# EAGLE board MOSFET_driver Panel v10 (EAGLE 6.3)
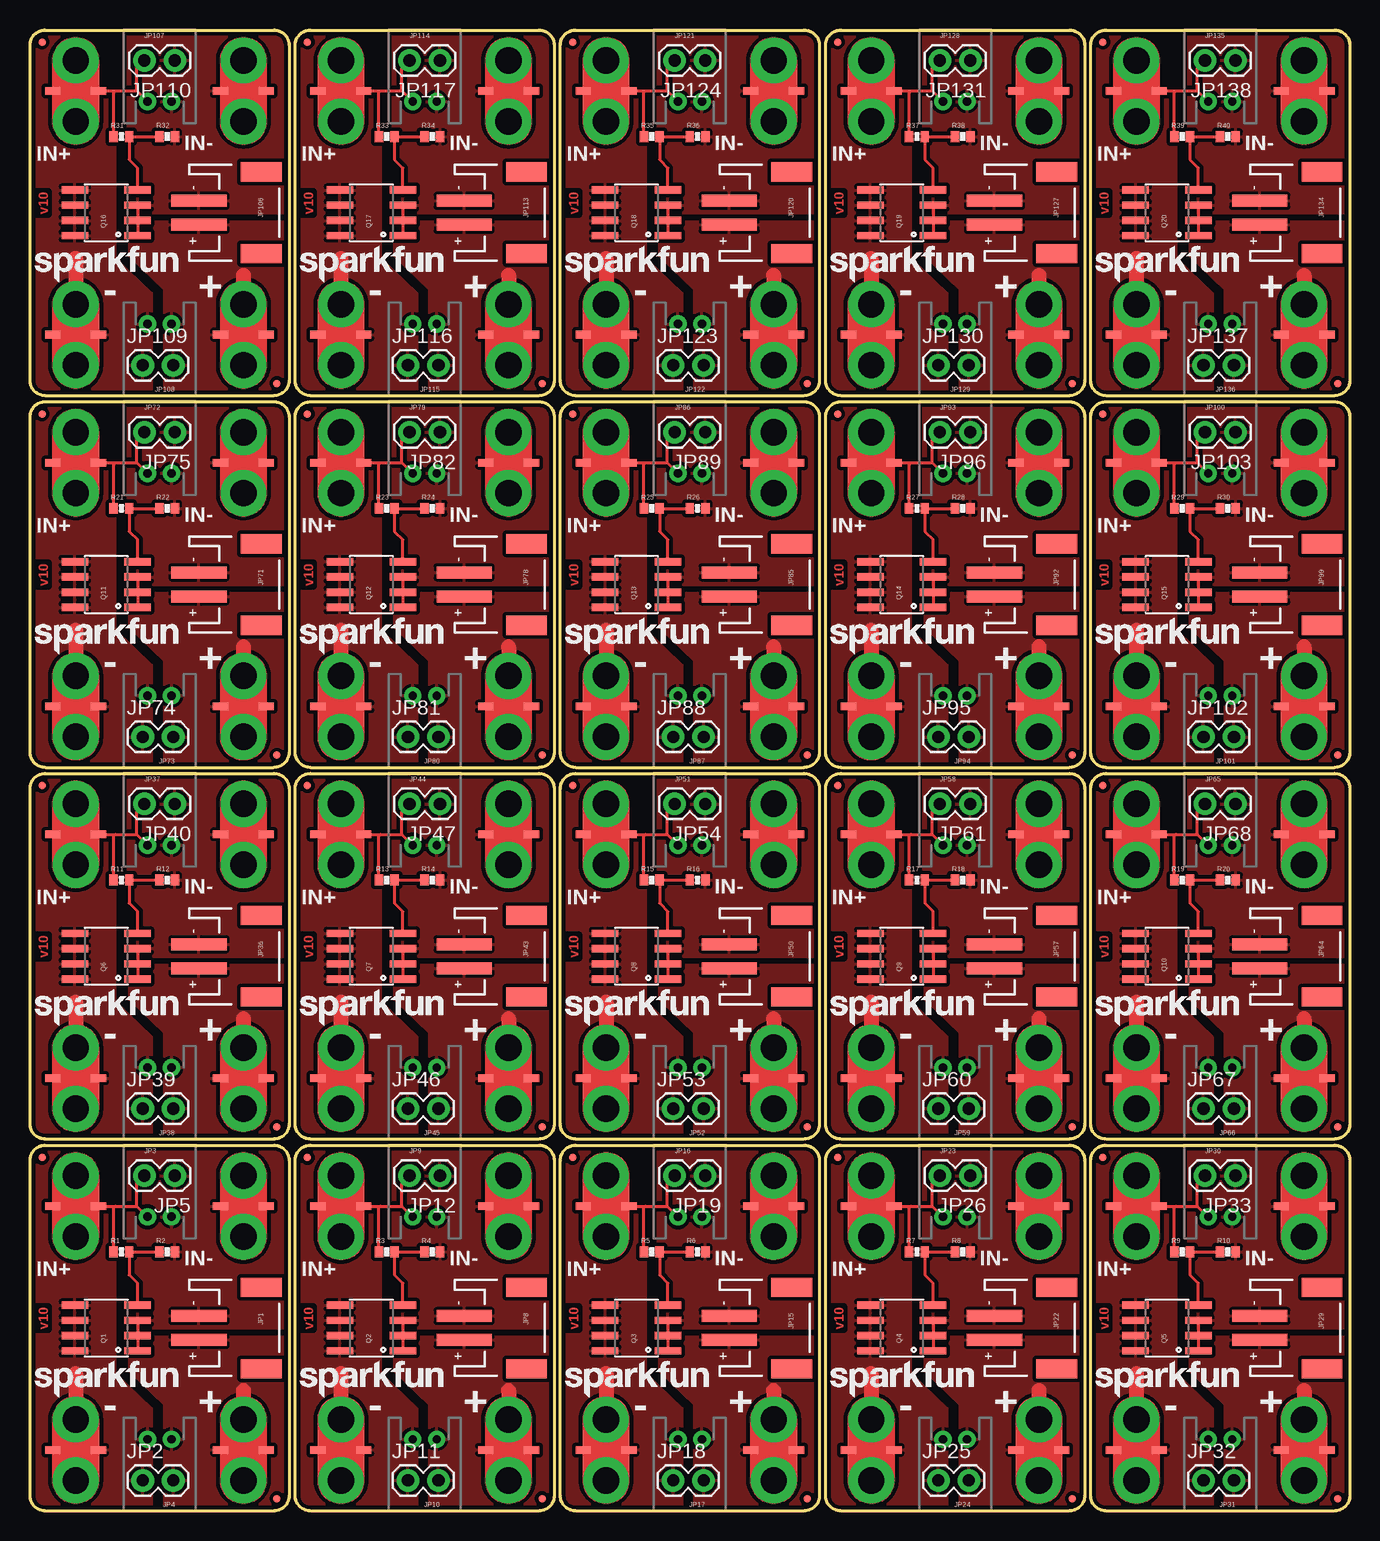
[diagram p0: board, top side]
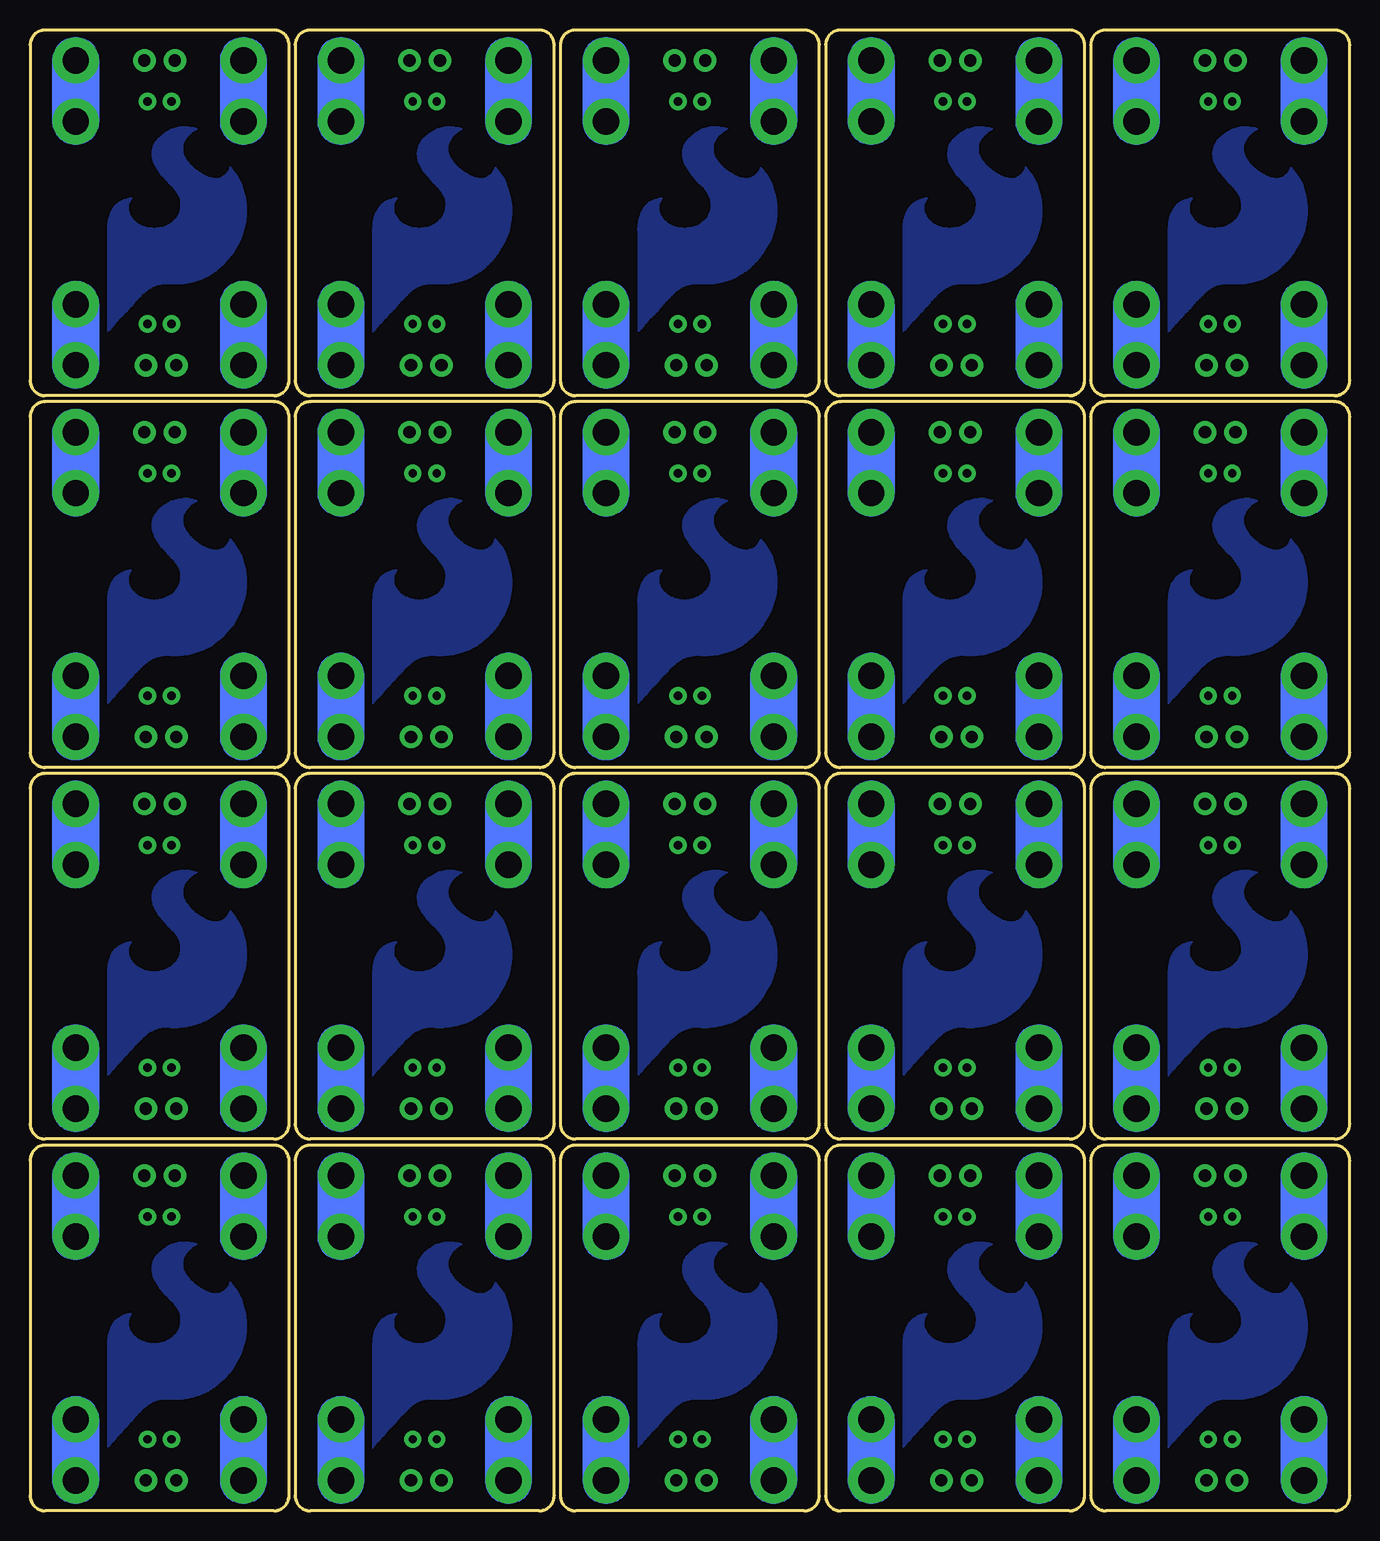
[diagram p1: board, bottom side, seen from below]

Size 109.98 x 123.44 mm. Coordinates in mm from the lower left corner, seen from the top.
Outline: 1.27,0 20.32,0 arc90 21.59,1.27 21.59,29.21 arc90 20.32,30.48 1.27,30.48 arc90 0,29.21 0,1.27 arc90 1.27,0
Outline: 23.37,0 42.42,0 arc90 43.69,1.27 43.69,29.21 arc90 42.42,30.48 23.37,30.48 arc90 22.1,29.21 22.1,1.27 arc90 23.37,0
Outline: 45.47,0 64.52,0 arc90 65.79,1.27 65.79,29.21 arc90 64.52,30.48 45.47,30.48 arc90 44.2,29.21 44.2,1.27 arc90 45.47,0
Outline: 67.56,0 86.61,0 arc90 87.88,1.27 87.88,29.21 arc90 86.61,30.48 67.56,30.48 arc90 66.29,29.21 66.29,1.27 arc90 67.56,0
Outline: 89.66,0 108.71,0 arc90 109.98,1.27 109.98,29.21 arc90 108.71,30.48 89.66,30.48 arc90 88.39,29.21 88.39,1.27 arc90 89.66,0
Outline: 1.27,30.99 20.32,30.99 arc90 21.59,32.26 21.59,60.2 arc90 20.32,61.47 1.27,61.47 arc90 0,60.2 0,32.26 arc90 1.27,30.99
Outline: 23.37,30.99 42.42,30.99 arc90 43.69,32.26 43.69,60.2 arc90 42.42,61.47 23.37,61.47 arc90 22.1,60.2 22.1,32.26 arc90 23.37,30.99
Outline: 45.47,30.99 64.52,30.99 arc90 65.79,32.26 65.79,60.2 arc90 64.52,61.47 45.47,61.47 arc90 44.2,60.2 44.2,32.26 arc90 45.47,30.99
Outline: 67.56,30.99 86.61,30.99 arc90 87.88,32.26 87.88,60.2 arc90 86.61,61.47 67.56,61.47 arc90 66.29,60.2 66.29,32.26 arc90 67.56,30.99
Outline: 89.66,30.99 108.71,30.99 arc90 109.98,32.26 109.98,60.2 arc90 108.71,61.47 89.66,61.47 arc90 88.39,60.2 88.39,32.26 arc90 89.66,30.99
Outline: 1.27,61.98 20.32,61.98 arc90 21.59,63.25 21.59,91.19 arc90 20.32,92.46 1.27,92.46 arc90 0,91.19 0,63.25 arc90 1.27,61.98
Outline: 23.37,61.98 42.42,61.98 arc90 43.69,63.25 43.69,91.19 arc90 42.42,92.46 23.37,92.46 arc90 22.1,91.19 22.1,63.25 arc90 23.37,61.98
Outline: 45.47,61.98 64.52,61.98 arc90 65.79,63.25 65.79,91.19 arc90 64.52,92.46 45.47,92.46 arc90 44.2,91.19 44.2,63.25 arc90 45.47,61.98
Outline: 67.56,61.98 86.61,61.98 arc90 87.88,63.25 87.88,91.19 arc90 86.61,92.46 67.56,92.46 arc90 66.29,91.19 66.29,63.25 arc90 67.56,61.98
Outline: 89.66,61.98 108.71,61.98 arc90 109.98,63.25 109.98,91.19 arc90 108.71,92.46 89.66,92.46 arc90 88.39,91.19 88.39,63.25 arc90 89.66,61.98
Outline: 1.27,92.96 20.32,92.96 arc90 21.59,94.23 21.59,122.17 arc90 20.32,123.44 1.27,123.44 arc90 0,122.17 0,94.23 arc90 1.27,92.96
Outline: 23.37,92.96 42.42,92.96 arc90 43.69,94.23 43.69,122.17 arc90 42.42,123.44 23.37,123.44 arc90 22.1,122.17 22.1,94.23 arc90 23.37,92.96
Outline: 45.47,92.96 64.52,92.96 arc90 65.79,94.23 65.79,122.17 arc90 64.52,123.44 45.47,123.44 arc90 44.2,122.17 44.2,94.23 arc90 45.47,92.96
Outline: 67.56,92.96 86.61,92.96 arc90 87.88,94.23 87.88,122.17 arc90 86.61,123.44 67.56,123.44 arc90 66.29,122.17 66.29,94.23 arc90 67.56,92.96
Outline: 89.66,92.96 108.71,92.96 arc90 109.98,94.23 109.98,122.17 arc90 108.71,123.44 89.66,123.44 arc90 88.39,122.17 88.39,94.23 arc90 89.66,92.96
Copper layers (1*16): Top 0.035mm / dielectric 1.5mm / Bottom 0.035mm
Design rules "default": minimum track width 8mil, minimum drill 20mil, track to track 8mil, track to pad 8mil, pad to pad 8mil, via to via 8mil, smd to smd 8mil, copper to edge 8mil, drill to drill 8mil, minimum pad ring 12mil, minimum via ring 10mil, stop-mask expansion 4mil, vias tented up to drill 20mil, thermal gap 10mil
bRestrict: area 0,-0.1 to 16.5,30.4; area 5.1,-0.1 to 21.6,30.4; area 22.1,-0.1 to 38.6,30.4; area 27.2,-0.1 to 43.7,30.4; area 44.2,-0.1 to 60.7,30.4; area 49.3,-0.1 to 65.8,30.4; area 66.3,-0.1 to 82.8,30.4; area 71.4,-0.1 to 87.9,30.4; area 88.4,-0.1 to 104.9,30.4; area 93.5,-0.1 to 110,30.4; area 0,30.9 to 16.5,61.3; area 5.1,30.9 to 21.6,61.3; area 22.1,30.9 to 38.6,61.3; area 27.2,30.9 to 43.7,61.3; area 44.2,30.9 to 60.7,61.3; area 49.3,30.9 to 65.8,61.3; area 66.3,30.9 to 82.8,61.3; area 71.4,30.9 to 87.9,61.3; area 88.4,30.9 to 104.9,61.3; area 93.5,30.9 to 110,61.3; area 0,61.8 to 16.5,92.3; area 5.1,61.8 to 21.6,92.3; area 22.1,61.8 to 38.6,92.3; area 27.2,61.8 to 43.7,92.3; area 44.2,61.8 to 60.7,92.3; area 49.3,61.8 to 65.8,92.3; area 66.3,61.8 to 82.8,92.3; area 71.4,61.8 to 87.9,92.3; area 88.4,61.8 to 104.9,92.3; area 93.5,61.8 to 110,92.3; area 0,92.8 to 16.5,123.3; area 5.1,92.8 to 21.6,123.3; area 22.1,92.8 to 38.6,123.3; area 27.2,92.8 to 43.7,123.3; area 44.2,92.8 to 60.7,123.3; area 49.3,92.8 to 65.8,123.3; area 66.3,92.8 to 82.8,123.3; area 71.4,92.8 to 87.9,123.3; area 88.4,92.8 to 104.9,123.3; area 93.5,92.8 to 110,123.3

## Footprints (pad centres in the part's own frame; a part is rotated, then mirrored left to right if it is on the bottom)
BUTTONHOLE = drill 2.2 pad 3.81: 1 0,0; P$2 5.08,0 | smd 0.635 x 1.27: P$1 2.54,1.905; P$3 2.54,-1.905
JST-2-SMD = smd 1 x 4.6: 1 -1,-3.7; 2 1,-3.7 | smd 1.6 x 3.4: NC1 -3.4,1.5; NC2 3.4,1.5
1X02 = drill 1.016 pad 1.88: 1 0,0; 2 2.54,0
JST-2-PTH-NS = drill 0.7 pad 1.448: 1 -1,0; 2 1,0
MICRO-FIDUCIAL = smd 0.635 x 0.635: 1 0,0
SO08 = smd 0.61 x 2.21: 1 -1.905,-2.616; 2 -0.635,-2.616; 3 0.635,-2.616; 4 1.905,-2.616; 5 1.905,2.616; 6 0.635,2.616; 7 -0.635,2.616; 8 -1.905,2.616
0402-RES = smd 0.7 x 0.9: 1 -0.65,0; 2 0.65,0

## Placement (x,y rotation side)
BH1  TRIG+  [BUTTONHOLE]  3.81,27.94 270 top
BH2  TRIG-  [BUTTONHOLE]  17.78,22.86 90 top
BH3  OUT+  [BUTTONHOLE]  17.78,2.54 90 top
BH4  OUT-  [BUTTONHOLE]  3.81,7.62 270 top
BH5  TRIG+  [BUTTONHOLE]  25.91,27.94 270 top
BH6  TRIG-  [BUTTONHOLE]  39.88,22.86 90 top
BH7  OUT+  [BUTTONHOLE]  39.88,2.54 90 top
BH8  OUT-  [BUTTONHOLE]  25.91,7.62 270 top
BH9  TRIG+  [BUTTONHOLE]  48.01,27.94 270 top
BH10  TRIG-  [BUTTONHOLE]  61.98,22.86 90 top
BH11  OUT+  [BUTTONHOLE]  61.98,2.54 90 top
BH12  OUT-  [BUTTONHOLE]  48.01,7.62 270 top
BH13  TRIG+  [BUTTONHOLE]  70.1,27.94 270 top
BH14  TRIG-  [BUTTONHOLE]  84.07,22.86 90 top
BH15  OUT+  [BUTTONHOLE]  84.07,2.54 90 top
BH16  OUT-  [BUTTONHOLE]  70.1,7.62 270 top
BH17  TRIG+  [BUTTONHOLE]  92.2,27.94 270 top
BH18  TRIG-  [BUTTONHOLE]  106.17,22.86 90 top
BH19  OUT+  [BUTTONHOLE]  106.17,2.54 90 top
BH20  OUT-  [BUTTONHOLE]  92.2,7.62 270 top
BH21  TRIG+  [BUTTONHOLE]  3.81,58.93 270 top
BH22  TRIG-  [BUTTONHOLE]  17.78,53.85 90 top
BH23  OUT+  [BUTTONHOLE]  17.78,33.53 90 top
BH24  OUT-  [BUTTONHOLE]  3.81,38.61 270 top
BH25  TRIG+  [BUTTONHOLE]  25.91,58.93 270 top
BH26  TRIG-  [BUTTONHOLE]  39.88,53.85 90 top
BH27  OUT+  [BUTTONHOLE]  39.88,33.53 90 top
BH28  OUT-  [BUTTONHOLE]  25.91,38.61 270 top
BH29  TRIG+  [BUTTONHOLE]  48.01,58.93 270 top
BH30  TRIG-  [BUTTONHOLE]  61.98,53.85 90 top
BH31  OUT+  [BUTTONHOLE]  61.98,33.53 90 top
BH32  OUT-  [BUTTONHOLE]  48.01,38.61 270 top
BH33  TRIG+  [BUTTONHOLE]  70.1,58.93 270 top
BH34  TRIG-  [BUTTONHOLE]  84.07,53.85 90 top
BH35  OUT+  [BUTTONHOLE]  84.07,33.53 90 top
BH36  OUT-  [BUTTONHOLE]  70.1,38.61 270 top
BH37  TRIG+  [BUTTONHOLE]  92.2,58.93 270 top
BH38  TRIG-  [BUTTONHOLE]  106.17,53.85 90 top
BH39  OUT+  [BUTTONHOLE]  106.17,33.53 90 top
BH40  OUT-  [BUTTONHOLE]  92.2,38.61 270 top
BH41  TRIG+  [BUTTONHOLE]  3.81,89.92 270 top
BH42  TRIG-  [BUTTONHOLE]  17.78,84.84 90 top
BH43  OUT+  [BUTTONHOLE]  17.78,64.52 90 top
BH44  OUT-  [BUTTONHOLE]  3.81,69.6 270 top
BH45  TRIG+  [BUTTONHOLE]  25.91,89.92 270 top
BH46  TRIG-  [BUTTONHOLE]  39.88,84.84 90 top
BH47  OUT+  [BUTTONHOLE]  39.88,64.52 90 top
BH48  OUT-  [BUTTONHOLE]  25.91,69.6 270 top
BH49  TRIG+  [BUTTONHOLE]  48.01,89.92 270 top
BH50  TRIG-  [BUTTONHOLE]  61.98,84.84 90 top
BH51  OUT+  [BUTTONHOLE]  61.98,64.52 90 top
BH52  OUT-  [BUTTONHOLE]  48.01,69.6 270 top
BH53  TRIG+  [BUTTONHOLE]  70.1,89.92 270 top
BH54  TRIG-  [BUTTONHOLE]  84.07,84.84 90 top
BH55  OUT+  [BUTTONHOLE]  84.07,64.52 90 top
BH56  OUT-  [BUTTONHOLE]  70.1,69.6 270 top
BH57  TRIG+  [BUTTONHOLE]  92.2,89.92 270 top
BH58  TRIG-  [BUTTONHOLE]  106.17,84.84 90 top
BH59  OUT+  [BUTTONHOLE]  106.17,64.52 90 top
BH60  OUT-  [BUTTONHOLE]  92.2,69.6 270 top
BH61  TRIG+  [BUTTONHOLE]  3.81,120.9 270 top
BH62  TRIG-  [BUTTONHOLE]  17.78,115.82 90 top
BH63  OUT+  [BUTTONHOLE]  17.78,95.5 90 top
BH64  OUT-  [BUTTONHOLE]  3.81,100.58 270 top
BH65  TRIG+  [BUTTONHOLE]  25.91,120.9 270 top
BH66  TRIG-  [BUTTONHOLE]  39.88,115.82 90 top
BH67  OUT+  [BUTTONHOLE]  39.88,95.5 90 top
BH68  OUT-  [BUTTONHOLE]  25.91,100.58 270 top
BH69  TRIG+  [BUTTONHOLE]  48.01,120.9 270 top
BH70  TRIG-  [BUTTONHOLE]  61.98,115.82 90 top
BH71  OUT+  [BUTTONHOLE]  61.98,95.5 90 top
BH72  OUT-  [BUTTONHOLE]  48.01,100.58 270 top
BH73  TRIG+  [BUTTONHOLE]  70.1,120.9 270 top
BH74  TRIG-  [BUTTONHOLE]  84.07,115.82 90 top
BH75  OUT+  [BUTTONHOLE]  84.07,95.5 90 top
BH76  OUT-  [BUTTONHOLE]  70.1,100.58 270 top
BH77  TRIG+  [BUTTONHOLE]  92.2,120.9 270 top
BH78  TRIG-  [BUTTONHOLE]  106.17,115.82 90 top
BH79  OUT+  [BUTTONHOLE]  106.17,95.5 90 top
BH80  OUT-  [BUTTONHOLE]  92.2,100.58 270 top
JP1  JST-SMT  [JST-2-SMD]  17.78,15.24 270 top
JP2  [1X02]  9.4,2.54 0 top
JP3  JST-PTH  [JST-2-PTH-NS]  10.79,24.51 0 top
JP4  JST-PTH  [JST-2-PTH-NS]  10.79,5.97 180 top
JP5  [1X02]  12.06,27.94 180 top
JP6  FIDUCIALUFIDUCIAL  [MICRO-FIDUCIAL]  20.57,1.02 0 top
JP7  FIDUCIALUFIDUCIAL  [MICRO-FIDUCIAL]  1.02,29.46 0 top
JP8  JST-SMT  [JST-2-SMD]  39.88,15.24 270 top
JP9  JST-PTH  [JST-2-PTH-NS]  32.89,24.51 0 top
JP10  JST-PTH  [JST-2-PTH-NS]  32.89,5.97 180 top
JP11  [1X02]  31.5,2.54 0 top
JP12  [1X02]  34.16,27.94 180 top
JP13  FIDUCIALUFIDUCIAL  [MICRO-FIDUCIAL]  42.67,1.02 0 top
JP14  FIDUCIALUFIDUCIAL  [MICRO-FIDUCIAL]  23.11,29.46 0 top
JP15  JST-SMT  [JST-2-SMD]  61.98,15.24 270 top
JP16  JST-PTH  [JST-2-PTH-NS]  54.99,24.51 0 top
JP17  JST-PTH  [JST-2-PTH-NS]  54.99,5.97 180 top
JP18  [1X02]  53.59,2.54 0 top
JP19  [1X02]  56.26,27.94 180 top
JP20  FIDUCIALUFIDUCIAL  [MICRO-FIDUCIAL]  64.77,1.02 0 top
JP21  FIDUCIALUFIDUCIAL  [MICRO-FIDUCIAL]  45.21,29.46 0 top
JP22  JST-SMT  [JST-2-SMD]  84.07,15.24 270 top
JP23  JST-PTH  [JST-2-PTH-NS]  77.09,24.51 0 top
JP24  JST-PTH  [JST-2-PTH-NS]  77.09,5.97 180 top
JP25  [1X02]  75.69,2.54 0 top
JP26  [1X02]  78.36,27.94 180 top
JP27  FIDUCIALUFIDUCIAL  [MICRO-FIDUCIAL]  86.87,1.02 0 top
JP28  FIDUCIALUFIDUCIAL  [MICRO-FIDUCIAL]  67.31,29.46 0 top
JP29  JST-SMT  [JST-2-SMD]  106.17,15.24 270 top
JP30  JST-PTH  [JST-2-PTH-NS]  99.19,24.51 0 top
JP31  JST-PTH  [JST-2-PTH-NS]  99.19,5.97 180 top
JP32  [1X02]  97.79,2.54 0 top
JP33  [1X02]  100.46,27.94 180 top
JP34  FIDUCIALUFIDUCIAL  [MICRO-FIDUCIAL]  108.97,1.02 0 top
JP35  FIDUCIALUFIDUCIAL  [MICRO-FIDUCIAL]  89.41,29.46 0 top
JP36  JST-SMT  [JST-2-SMD]  17.78,46.23 270 top
JP37  JST-PTH  [JST-2-PTH-NS]  10.79,55.5 0 top
JP38  JST-PTH  [JST-2-PTH-NS]  10.79,36.96 180 top
JP39  [1X02]  9.4,33.53 0 top
JP40  [1X02]  12.06,58.93 180 top
JP41  FIDUCIALUFIDUCIAL  [MICRO-FIDUCIAL]  20.57,32 0 top
JP42  FIDUCIALUFIDUCIAL  [MICRO-FIDUCIAL]  1.02,60.45 0 top
JP43  JST-SMT  [JST-2-SMD]  39.88,46.23 270 top
JP44  JST-PTH  [JST-2-PTH-NS]  32.89,55.5 0 top
JP45  JST-PTH  [JST-2-PTH-NS]  32.89,36.96 180 top
JP46  [1X02]  31.5,33.53 0 top
JP47  [1X02]  34.16,58.93 180 top
JP48  FIDUCIALUFIDUCIAL  [MICRO-FIDUCIAL]  42.67,32 0 top
JP49  FIDUCIALUFIDUCIAL  [MICRO-FIDUCIAL]  23.11,60.45 0 top
JP50  JST-SMT  [JST-2-SMD]  61.98,46.23 270 top
JP51  JST-PTH  [JST-2-PTH-NS]  54.99,55.5 0 top
JP52  JST-PTH  [JST-2-PTH-NS]  54.99,36.96 180 top
JP53  [1X02]  53.59,33.53 0 top
JP54  [1X02]  56.26,58.93 180 top
JP55  FIDUCIALUFIDUCIAL  [MICRO-FIDUCIAL]  64.77,32 0 top
JP56  FIDUCIALUFIDUCIAL  [MICRO-FIDUCIAL]  45.21,60.45 0 top
JP57  JST-SMT  [JST-2-SMD]  84.07,46.23 270 top
JP58  JST-PTH  [JST-2-PTH-NS]  77.09,55.5 0 top
JP59  JST-PTH  [JST-2-PTH-NS]  77.09,36.96 180 top
JP60  [1X02]  75.69,33.53 0 top
JP61  [1X02]  78.36,58.93 180 top
JP62  FIDUCIALUFIDUCIAL  [MICRO-FIDUCIAL]  86.87,32 0 top
JP63  FIDUCIALUFIDUCIAL  [MICRO-FIDUCIAL]  67.31,60.45 0 top
JP64  JST-SMT  [JST-2-SMD]  106.17,46.23 270 top
JP65  JST-PTH  [JST-2-PTH-NS]  99.19,55.5 0 top
JP66  JST-PTH  [JST-2-PTH-NS]  99.19,36.96 180 top
JP67  [1X02]  97.79,33.53 0 top
JP68  [1X02]  100.46,58.93 180 top
JP69  FIDUCIALUFIDUCIAL  [MICRO-FIDUCIAL]  108.97,32 0 top
JP70  FIDUCIALUFIDUCIAL  [MICRO-FIDUCIAL]  89.41,60.45 0 top
JP71  JST-SMT  [JST-2-SMD]  17.78,77.22 270 top
JP72  JST-PTH  [JST-2-PTH-NS]  10.79,86.49 0 top
JP73  JST-PTH  [JST-2-PTH-NS]  10.79,67.94 180 top
JP74  [1X02]  9.4,64.52 0 top
JP75  [1X02]  12.06,89.92 180 top
JP76  FIDUCIALUFIDUCIAL  [MICRO-FIDUCIAL]  20.57,62.99 0 top
JP77  FIDUCIALUFIDUCIAL  [MICRO-FIDUCIAL]  1.02,91.44 0 top
JP78  JST-SMT  [JST-2-SMD]  39.88,77.22 270 top
JP79  JST-PTH  [JST-2-PTH-NS]  32.89,86.49 0 top
JP80  JST-PTH  [JST-2-PTH-NS]  32.89,67.94 180 top
JP81  [1X02]  31.5,64.52 0 top
JP82  [1X02]  34.16,89.92 180 top
JP83  FIDUCIALUFIDUCIAL  [MICRO-FIDUCIAL]  42.67,62.99 0 top
JP84  FIDUCIALUFIDUCIAL  [MICRO-FIDUCIAL]  23.11,91.44 0 top
JP85  JST-SMT  [JST-2-SMD]  61.98,77.22 270 top
JP86  JST-PTH  [JST-2-PTH-NS]  54.99,86.49 0 top
JP87  JST-PTH  [JST-2-PTH-NS]  54.99,67.94 180 top
JP88  [1X02]  53.59,64.52 0 top
JP89  [1X02]  56.26,89.92 180 top
JP90  FIDUCIALUFIDUCIAL  [MICRO-FIDUCIAL]  64.77,62.99 0 top
JP91  FIDUCIALUFIDUCIAL  [MICRO-FIDUCIAL]  45.21,91.44 0 top
JP92  JST-SMT  [JST-2-SMD]  84.07,77.22 270 top
JP93  JST-PTH  [JST-2-PTH-NS]  77.09,86.49 0 top
JP94  JST-PTH  [JST-2-PTH-NS]  77.09,67.94 180 top
JP95  [1X02]  75.69,64.52 0 top
JP96  [1X02]  78.36,89.92 180 top
JP97  FIDUCIALUFIDUCIAL  [MICRO-FIDUCIAL]  86.87,62.99 0 top
JP98  FIDUCIALUFIDUCIAL  [MICRO-FIDUCIAL]  67.31,91.44 0 top
JP99  JST-SMT  [JST-2-SMD]  106.17,77.22 270 top
JP100  JST-PTH  [JST-2-PTH-NS]  99.19,86.49 0 top
JP101  JST-PTH  [JST-2-PTH-NS]  99.19,67.94 180 top
JP102  [1X02]  97.79,64.52 0 top
JP103  [1X02]  100.46,89.92 180 top
JP104  FIDUCIALUFIDUCIAL  [MICRO-FIDUCIAL]  108.97,62.99 0 top
JP105  FIDUCIALUFIDUCIAL  [MICRO-FIDUCIAL]  89.41,91.44 0 top
JP106  JST-SMT  [JST-2-SMD]  17.78,108.2 270 top
JP107  JST-PTH  [JST-2-PTH-NS]  10.79,117.47 0 top
JP108  JST-PTH  [JST-2-PTH-NS]  10.79,98.93 180 top
JP109  [1X02]  9.4,95.5 0 top
JP110  [1X02]  12.06,120.9 180 top
JP111  FIDUCIALUFIDUCIAL  [MICRO-FIDUCIAL]  20.57,93.98 0 top
JP112  FIDUCIALUFIDUCIAL  [MICRO-FIDUCIAL]  1.02,122.43 0 top
JP113  JST-SMT  [JST-2-SMD]  39.88,108.2 270 top
JP114  JST-PTH  [JST-2-PTH-NS]  32.89,117.47 0 top
JP115  JST-PTH  [JST-2-PTH-NS]  32.89,98.93 180 top
JP116  [1X02]  31.5,95.5 0 top
JP117  [1X02]  34.16,120.9 180 top
JP118  FIDUCIALUFIDUCIAL  [MICRO-FIDUCIAL]  42.67,93.98 0 top
JP119  FIDUCIALUFIDUCIAL  [MICRO-FIDUCIAL]  23.11,122.43 0 top
JP120  JST-SMT  [JST-2-SMD]  61.98,108.2 270 top
JP121  JST-PTH  [JST-2-PTH-NS]  54.99,117.47 0 top
JP122  JST-PTH  [JST-2-PTH-NS]  54.99,98.93 180 top
JP123  [1X02]  53.59,95.5 0 top
JP124  [1X02]  56.26,120.9 180 top
JP125  FIDUCIALUFIDUCIAL  [MICRO-FIDUCIAL]  64.77,93.98 0 top
JP126  FIDUCIALUFIDUCIAL  [MICRO-FIDUCIAL]  45.21,122.43 0 top
JP127  JST-SMT  [JST-2-SMD]  84.07,108.2 270 top
JP128  JST-PTH  [JST-2-PTH-NS]  77.09,117.47 0 top
JP129  JST-PTH  [JST-2-PTH-NS]  77.09,98.93 180 top
JP130  [1X02]  75.69,95.5 0 top
JP131  [1X02]  78.36,120.9 180 top
JP132  FIDUCIALUFIDUCIAL  [MICRO-FIDUCIAL]  86.87,93.98 0 top
JP133  FIDUCIALUFIDUCIAL  [MICRO-FIDUCIAL]  67.31,122.43 0 top
JP134  JST-SMT  [JST-2-SMD]  106.17,108.2 270 top
JP135  JST-PTH  [JST-2-PTH-NS]  99.19,117.47 0 top
JP136  JST-PTH  [JST-2-PTH-NS]  99.19,98.93 180 top
JP137  [1X02]  97.79,95.5 0 top
JP138  [1X02]  100.46,120.9 180 top
JP139  FIDUCIALUFIDUCIAL  [MICRO-FIDUCIAL]  108.97,93.98 0 top
JP140  FIDUCIALUFIDUCIAL  [MICRO-FIDUCIAL]  89.41,122.43 0 top
Q1  FDS6630A  [SO08]  6.35,15.24 90 top
Q2  FDS6630A  [SO08]  28.45,15.24 90 top
Q3  FDS6630A  [SO08]  50.55,15.24 90 top
Q4  FDS6630A  [SO08]  72.64,15.24 90 top
Q5  FDS6630A  [SO08]  94.74,15.24 90 top
Q6  FDS6630A  [SO08]  6.35,46.23 90 top
Q7  FDS6630A  [SO08]  28.45,46.23 90 top
Q8  FDS6630A  [SO08]  50.55,46.23 90 top
Q9  FDS6630A  [SO08]  72.64,46.23 90 top
Q10  FDS6630A  [SO08]  94.74,46.23 90 top
Q11  FDS6630A  [SO08]  6.35,77.22 90 top
Q12  FDS6630A  [SO08]  28.45,77.22 90 top
Q13  FDS6630A  [SO08]  50.55,77.22 90 top
Q14  FDS6630A  [SO08]  72.64,77.22 90 top
Q15  FDS6630A  [SO08]  94.74,77.22 90 top
Q16  FDS6630A  [SO08]  6.35,108.2 90 top
Q17  FDS6630A  [SO08]  28.45,108.2 90 top
Q18  FDS6630A  [SO08]  50.55,108.2 90 top
Q19  FDS6630A  [SO08]  72.64,108.2 90 top
Q20  FDS6630A  [SO08]  94.74,108.2 90 top
R1  10k  [0402-RES]  7.62,21.59 0 top
R2  1M  [0402-RES]  11.43,21.59 0 top
R3  10k  [0402-RES]  29.72,21.59 0 top
R4  1M  [0402-RES]  33.53,21.59 0 top
R5  10k  [0402-RES]  51.82,21.59 0 top
R6  1M  [0402-RES]  55.63,21.59 0 top
R7  10k  [0402-RES]  73.91,21.59 0 top
R8  1M  [0402-RES]  77.72,21.59 0 top
R9  10k  [0402-RES]  96.01,21.59 0 top
R10  1M  [0402-RES]  99.82,21.59 0 top
R11  10k  [0402-RES]  7.62,52.58 0 top
R12  1M  [0402-RES]  11.43,52.58 0 top
R13  10k  [0402-RES]  29.72,52.58 0 top
R14  1M  [0402-RES]  33.53,52.58 0 top
R15  10k  [0402-RES]  51.82,52.58 0 top
R16  1M  [0402-RES]  55.63,52.58 0 top
R17  10k  [0402-RES]  73.91,52.58 0 top
R18  1M  [0402-RES]  77.72,52.58 0 top
R19  10k  [0402-RES]  96.01,52.58 0 top
R20  1M  [0402-RES]  99.82,52.58 0 top
R21  10k  [0402-RES]  7.62,83.57 0 top
R22  1M  [0402-RES]  11.43,83.57 0 top
R23  10k  [0402-RES]  29.72,83.57 0 top
R24  1M  [0402-RES]  33.53,83.57 0 top
R25  10k  [0402-RES]  51.82,83.57 0 top
R26  1M  [0402-RES]  55.63,83.57 0 top
R27  10k  [0402-RES]  73.91,83.57 0 top
R28  1M  [0402-RES]  77.72,83.57 0 top
R29  10k  [0402-RES]  96.01,83.57 0 top
R30  1M  [0402-RES]  99.82,83.57 0 top
R31  10k  [0402-RES]  7.62,114.55 0 top
R32  1M  [0402-RES]  11.43,114.55 0 top
R33  10k  [0402-RES]  29.72,114.55 0 top
R34  1M  [0402-RES]  33.53,114.55 0 top
R35  10k  [0402-RES]  51.82,114.55 0 top
R36  1M  [0402-RES]  55.63,114.55 0 top
R37  10k  [0402-RES]  73.91,114.55 0 top
R38  1M  [0402-RES]  77.72,114.55 0 top
R39  10k  [0402-RES]  96.01,114.55 0 top
R40  1M  [0402-RES]  99.82,114.55 0 top

## Library data of the parts
BH1-BH80 = LilyPad-Wearables; NO_PART: 1
JP1 JP8 JP15 JP22 JP29 JP36 JP43 JP50 JP57 JP64 JP71 JP78 JP85 JP92 JP99 JP106 JP113 JP120 JP127 JP134 = SparkFun-Connectors; PROD_ID: CONN-08352
JP2 JP5 JP11 JP12 JP18 JP19 JP25 JP26 JP32 JP33 JP39 JP40 JP46 JP47 JP53 JP54 JP60 JP61 JP67 JP68 JP74 JP75 JP81 JP82 JP88 JP89 JP95 JP96 JP102 JP103 JP109 JP110 JP116 JP117 JP123 JP124 JP130 JP131 JP137 JP138 = SparkFun-Connectors
JP3 JP4 JP9 JP10 JP16 JP17 JP23 JP24 JP30 JP31 JP37 JP38 JP44 JP45 JP51 JP52 JP58 JP59 JP65 JP66 JP72 JP73 JP79 JP80 JP86 JP87 JP93 JP94 JP100 JP101 JP107 JP108 JP114 JP115 JP121 JP122 JP128 JP129 JP135 JP136 = SparkFun-Connectors; NO_PART: 1
JP6 JP7 JP13 JP14 JP20 JP21 JP27 JP28 JP34 JP35 JP41 JP42 JP48 JP49 JP55 JP56 JP62 JP63 JP69 JP70 JP76 JP77 JP83 JP84 JP90 JP91 JP97 JP98 JP104 JP105 JP111 JP112 JP118 JP119 JP125 JP126 JP132 JP133 JP139 JP140 = SparkFun
Q1-Q20 = SparkFun-DiscreteSemi; PROD_ID: IC-08089
R1 R3 R5 R7 R9 R11 R13 R15 R17 R19 R21 R23 R25 R27 R29 R31 R33 R35 R37 R39 = SparkFun-Passives; PROD_ID: RES-00824
R2 R4 R6 R8 R10 R12 R14 R16 R18 R20 R22 R24 R26 R28 R30 R32 R34 R36 R38 R40 = SparkFun-Resistors; PROD_ID: RES-07868

## Nets
GND: BH2.P$1 JP1.1 JP3.2 JP5.1 Q1.1 Q1.2 Q1.3 R2.2
GND1: BH6.P$1 JP8.1 JP9.2 JP12.1 Q2.1 Q2.2 Q2.3 R4.2
GND2: BH10.P$1 JP15.1 JP16.2 JP19.1 Q3.1 Q3.2 Q3.3 R6.2
GND3: BH14.P$1 JP22.1 JP23.2 JP26.1 Q4.1 Q4.2 Q4.3 R8.2
GND4: BH18.P$1 JP29.1 JP30.2 JP33.1 Q5.1 Q5.2 Q5.3 R10.2
GND5: BH22.P$1 JP36.1 JP37.2 JP40.1 Q6.1 Q6.2 Q6.3 R12.2
GND6: BH26.P$1 JP43.1 JP44.2 JP47.1 Q7.1 Q7.2 Q7.3 R14.2
GND7: BH30.P$1 JP50.1 JP51.2 JP54.1 Q8.1 Q8.2 Q8.3 R16.2
GND8: BH34.P$1 JP57.1 JP58.2 JP61.1 Q9.1 Q9.2 Q9.3 R18.2
GND9: BH38.P$1 JP64.1 JP65.2 JP68.1 Q10.1 Q10.2 Q10.3 R20.2
GND10: BH42.P$1 JP71.1 JP72.2 JP75.1 Q11.1 Q11.2 Q11.3 R22.2
GND11: BH46.P$1 JP78.1 JP79.2 JP82.1 Q12.1 Q12.2 Q12.3 R24.2
GND12: BH50.P$1 JP85.1 JP86.2 JP89.1 Q13.1 Q13.2 Q13.3 R26.2
GND13: BH54.P$1 JP92.1 JP93.2 JP96.1 Q14.1 Q14.2 Q14.3 R28.2
GND14: BH58.P$1 JP99.1 JP100.2 JP103.1 Q15.1 Q15.2 Q15.3 R30.2
GND15: BH62.P$1 JP106.1 JP107.2 JP110.1 Q16.1 Q16.2 Q16.3 R32.2
GND16: BH66.P$1 JP113.1 JP114.2 JP117.1 Q17.1 Q17.2 Q17.3 R34.2
GND17: BH70.P$1 JP120.1 JP121.2 JP124.1 Q18.1 Q18.2 Q18.3 R36.2
GND18: BH74.P$1 JP127.1 JP128.2 JP131.1 Q19.1 Q19.2 Q19.3 R38.2
GND19: BH78.P$1 JP134.1 JP135.2 JP138.1 Q20.1 Q20.2 Q20.3 R40.2
N$1: Q1.4 R1.2 R2.1
N$3: Q2.4 R3.2 R4.1
N$5: Q3.4 R5.2 R6.1
N$7: Q4.4 R7.2 R8.1
N$9: Q5.4 R9.2 R10.1
N$11: Q6.4 R11.2 R12.1
N$13: Q7.4 R13.2 R14.1
N$15: Q8.4 R15.2 R16.1
N$17: Q9.4 R17.2 R18.1
N$19: Q10.4 R19.2 R20.1
N$21: Q11.4 R21.2 R22.1
N$23: Q12.4 R23.2 R24.1
N$25: Q13.4 R25.2 R26.1
N$27: Q14.4 R27.2 R28.1
N$29: Q15.4 R29.2 R30.1
N$31: Q16.4 R31.2 R32.1
N$33: Q17.4 R33.2 R34.1
N$35: Q18.4 R35.2 R36.1
N$37: Q19.4 R37.2 R38.1
N$39: Q20.4 R39.2 R40.1
OUT-: BH4.P$1 JP2.1 JP4.2 Q1.5 Q1.6 Q1.7 Q1.8
OUT-1: BH8.P$1 JP10.2 JP11.1 Q2.5 Q2.6 Q2.7 Q2.8
OUT-2: BH12.P$1 JP17.2 JP18.1 Q3.5 Q3.6 Q3.7 Q3.8
OUT-3: BH16.P$1 JP24.2 JP25.1 Q4.5 Q4.6 Q4.7 Q4.8
OUT-4: BH20.P$1 JP31.2 JP32.1 Q5.5 Q5.6 Q5.7 Q5.8
OUT-5: BH24.P$1 JP38.2 JP39.1 Q6.5 Q6.6 Q6.7 Q6.8
OUT-6: BH28.P$1 JP45.2 JP46.1 Q7.5 Q7.6 Q7.7 Q7.8
OUT-7: BH32.P$1 JP52.2 JP53.1 Q8.5 Q8.6 Q8.7 Q8.8
OUT-8: BH36.P$1 JP59.2 JP60.1 Q9.5 Q9.6 Q9.7 Q9.8
OUT-9: BH40.P$1 JP66.2 JP67.1 Q10.5 Q10.6 Q10.7 Q10.8
OUT-10: BH44.P$1 JP73.2 JP74.1 Q11.5 Q11.6 Q11.7 Q11.8
OUT-11: BH48.P$1 JP80.2 JP81.1 Q12.5 Q12.6 Q12.7 Q12.8
OUT-12: BH52.P$1 JP87.2 JP88.1 Q13.5 Q13.6 Q13.7 Q13.8
OUT-13: BH56.P$1 JP94.2 JP95.1 Q14.5 Q14.6 Q14.7 Q14.8
OUT-14: BH60.P$1 JP101.2 JP102.1 Q15.5 Q15.6 Q15.7 Q15.8
OUT-15: BH64.P$1 JP108.2 JP109.1 Q16.5 Q16.6 Q16.7 Q16.8
OUT-16: BH68.P$1 JP115.2 JP116.1 Q17.5 Q17.6 Q17.7 Q17.8
OUT-17: BH72.P$1 JP122.2 JP123.1 Q18.5 Q18.6 Q18.7 Q18.8
OUT-18: BH76.P$1 JP129.2 JP130.1 Q19.5 Q19.6 Q19.7 Q19.8
OUT-19: BH80.P$1 JP136.2 JP137.1 Q20.5 Q20.6 Q20.7 Q20.8
TRIG+: BH1.P$1 JP3.1 JP5.2 R1.1
TRIG+1: BH5.P$1 JP9.1 JP12.2 R3.1
TRIG+2: BH9.P$1 JP16.1 JP19.2 R5.1
TRIG+3: BH13.P$1 JP23.1 JP26.2 R7.1
TRIG+4: BH17.P$1 JP30.1 JP33.2 R9.1
TRIG+5: BH21.P$1 JP37.1 JP40.2 R11.1
TRIG+6: BH25.P$1 JP44.1 JP47.2 R13.1
TRIG+7: BH29.P$1 JP51.1 JP54.2 R15.1
TRIG+8: BH33.P$1 JP58.1 JP61.2 R17.1
TRIG+9: BH37.P$1 JP65.1 JP68.2 R19.1
TRIG+10: BH41.P$1 JP72.1 JP75.2 R21.1
TRIG+11: BH45.P$1 JP79.1 JP82.2 R23.1
TRIG+12: BH49.P$1 JP86.1 JP89.2 R25.1
TRIG+13: BH53.P$1 JP93.1 JP96.2 R27.1
TRIG+14: BH57.P$1 JP100.1 JP103.2 R29.1
TRIG+15: BH61.P$1 JP107.1 JP110.2 R31.1
TRIG+16: BH65.P$1 JP114.1 JP117.2 R33.1
TRIG+17: BH69.P$1 JP121.1 JP124.2 R35.1
TRIG+18: BH73.P$1 JP128.1 JP131.2 R37.1
TRIG+19: BH77.P$1 JP135.1 JP138.2 R39.1
V_BATT: BH3.P$1 JP1.2 JP2.2 JP4.1
V_BATT1: BH7.P$1 JP8.2 JP10.1 JP11.2
V_BATT2: BH11.P$1 JP15.2 JP17.1 JP18.2
V_BATT3: BH15.P$1 JP22.2 JP24.1 JP25.2
V_BATT4: BH19.P$1 JP29.2 JP31.1 JP32.2
V_BATT5: BH23.P$1 JP36.2 JP38.1 JP39.2
V_BATT6: BH27.P$1 JP43.2 JP45.1 JP46.2
V_BATT7: BH31.P$1 JP50.2 JP52.1 JP53.2
V_BATT8: BH35.P$1 JP57.2 JP59.1 JP60.2
V_BATT9: BH39.P$1 JP64.2 JP66.1 JP67.2
V_BATT10: BH43.P$1 JP71.2 JP73.1 JP74.2
V_BATT11: BH47.P$1 JP78.2 JP80.1 JP81.2
V_BATT12: BH51.P$1 JP85.2 JP87.1 JP88.2
V_BATT13: BH55.P$1 JP92.2 JP94.1 JP95.2
V_BATT14: BH59.P$1 JP99.2 JP101.1 JP102.2
V_BATT15: BH63.P$1 JP106.2 JP108.1 JP109.2
V_BATT16: BH67.P$1 JP113.2 JP115.1 JP116.2
V_BATT17: BH71.P$1 JP120.2 JP122.1 JP123.2
V_BATT18: BH75.P$1 JP127.2 JP129.1 JP130.2
V_BATT19: BH79.P$1 JP134.2 JP136.1 JP137.2

## Tracks (layer width: path | path; a pad name or v marks a point on that pad's centre or on a via)
GND
  Top 0.254: Q1.3 Q1.2 Q1.1
  pour Top (isolate 0.305): 8.13,30.48 8.13,15.24 21.59,15.24 21.59,30.48
GND1
  Top 0.254: Q2.3 Q2.2 Q2.1
  pour Top (isolate 0.305): 30.23,30.48 30.23,15.24 43.69,15.24 43.69,30.48
GND2
  Top 0.254: Q3.3 Q3.2 Q3.1
  pour Top (isolate 0.305): 52.32,30.48 52.32,15.24 65.79,15.24 65.79,30.48
GND3
  Top 0.254: Q4.3 Q4.2 Q4.1
  pour Top (isolate 0.305): 74.42,30.48 74.42,15.24 87.88,15.24 87.88,30.48
GND4
  Top 0.254: Q5.3 Q5.2 Q5.1
  pour Top (isolate 0.305): 96.52,30.48 96.52,15.24 109.98,15.24 109.98,30.48
GND5
  Top 0.254: Q6.3 Q6.2 Q6.1
  pour Top (isolate 0.305): 8.13,61.47 8.13,46.23 21.59,46.23 21.59,61.47
GND6
  Top 0.254: Q7.3 Q7.2 Q7.1
  pour Top (isolate 0.305): 30.23,61.47 30.23,46.23 43.69,46.23 43.69,61.47
GND7
  Top 0.254: Q8.3 Q8.2 Q8.1
  pour Top (isolate 0.305): 52.32,61.47 52.32,46.23 65.79,46.23 65.79,61.47
GND8
  Top 0.254: Q9.3 Q9.2 Q9.1
  pour Top (isolate 0.305): 74.42,61.47 74.42,46.23 87.88,46.23 87.88,61.47
GND9
  Top 0.254: Q10.3 Q10.2 Q10.1
  pour Top (isolate 0.305): 96.52,61.47 96.52,46.23 109.98,46.23 109.98,61.47
GND10
  Top 0.254: Q11.3 Q11.2 Q11.1
  pour Top (isolate 0.305): 8.13,92.46 8.13,77.22 21.59,77.22 21.59,92.46
GND11
  Top 0.254: Q12.3 Q12.2 Q12.1
  pour Top (isolate 0.305): 30.23,92.46 30.23,77.22 43.69,77.22 43.69,92.46
GND12
  Top 0.254: Q13.3 Q13.2 Q13.1
  pour Top (isolate 0.305): 52.32,92.46 52.32,77.22 65.79,77.22 65.79,92.46
GND13
  Top 0.254: Q14.3 Q14.2 Q14.1
  pour Top (isolate 0.305): 74.42,92.46 74.42,77.22 87.88,77.22 87.88,92.46
GND14
  Top 0.254: Q15.3 Q15.2 Q15.1
  pour Top (isolate 0.305): 96.52,92.46 96.52,77.22 109.98,77.22 109.98,92.46
GND15
  Top 0.254: Q16.3 Q16.2 Q16.1
  pour Top (isolate 0.305): 8.13,123.44 8.13,108.2 21.59,108.2 21.59,123.44
GND16
  Top 0.254: Q17.3 Q17.2 Q17.1
  pour Top (isolate 0.305): 30.23,123.44 30.23,108.2 43.69,108.2 43.69,123.44
GND17
  Top 0.254: Q18.3 Q18.2 Q18.1
  pour Top (isolate 0.305): 52.32,123.44 52.32,108.2 65.79,108.2 65.79,123.44
GND18
  Top 0.254: Q19.3 Q19.2 Q19.1
  pour Top (isolate 0.305): 74.42,123.44 74.42,108.2 87.88,108.2 87.88,123.44
GND19
  Top 0.254: Q20.3 Q20.2 Q20.1
  pour Top (isolate 0.305): 96.52,123.44 96.52,108.2 109.98,108.2 109.98,123.44
N$1
  Top 0.254: R2.1 R1.2 8.27,19.67 8.97,18.97 Q1.4
N$2
  pour Bottom (isolate 0.305): 0,30.48 21.59,30.48 21.59,0 0,0
N$3
  Top 0.254: R4.1 R3.2 30.37,19.67 31.06,18.97 Q2.4
N$4
  pour Bottom (isolate 0.305): 22.1,30.48 43.69,30.48 43.69,0 22.1,0
N$5
  Top 0.254: R6.1 R5.2 52.47,19.67 53.16,18.97 Q3.4
N$6
  pour Bottom (isolate 0.305): 44.2,30.48 65.79,30.48 65.79,0 44.2,0
N$7
  Top 0.254: R8.1 R7.2 74.56,19.67 75.26,18.97 Q4.4
N$8
  pour Bottom (isolate 0.305): 66.29,30.48 87.88,30.48 87.88,0 66.29,0
N$9
  Top 0.254: R10.1 R9.2 96.66,19.67 97.36,18.97 Q5.4
N$10
  pour Bottom (isolate 0.305): 88.39,30.48 109.98,30.48 109.98,0 88.39,0
N$11
  Top 0.254: R12.1 R11.2 8.27,50.66 8.97,49.96 Q6.4
N$12
  pour Bottom (isolate 0.305): 0,61.47 21.59,61.47 21.59,30.99 0,30.99
N$13
  Top 0.254: R14.1 R13.2 30.37,50.66 31.06,49.96 Q7.4
N$14
  pour Bottom (isolate 0.305): 22.1,61.47 43.69,61.47 43.69,30.99 22.1,30.99
N$15
  Top 0.254: R16.1 R15.2 52.47,50.66 53.16,49.96 Q8.4
N$16
  pour Bottom (isolate 0.305): 44.2,61.47 65.79,61.47 65.79,30.99 44.2,30.99
N$17
  Top 0.254: R18.1 R17.2 74.56,50.66 75.26,49.96 Q9.4
N$18
  pour Bottom (isolate 0.305): 66.29,61.47 87.88,61.47 87.88,30.99 66.29,30.99
N$19
  Top 0.254: R20.1 R19.2 96.66,50.66 97.36,49.96 Q10.4
N$20
  pour Bottom (isolate 0.305): 88.39,61.47 109.98,61.47 109.98,30.99 88.39,30.99
N$21
  Top 0.254: R22.1 R21.2 8.27,81.65 8.97,80.95 Q11.4
N$22
  pour Bottom (isolate 0.305): 0,92.46 21.59,92.46 21.59,61.98 0,61.98
N$23
  Top 0.254: R24.1 R23.2 30.37,81.65 31.06,80.95 Q12.4
N$24
  pour Bottom (isolate 0.305): 22.1,92.46 43.69,92.46 43.69,61.98 22.1,61.98
N$25
  Top 0.254: R26.1 R25.2 52.47,81.65 53.16,80.95 Q13.4
N$26
  pour Bottom (isolate 0.305): 44.2,92.46 65.79,92.46 65.79,61.98 44.2,61.98
N$27
  Top 0.254: R28.1 R27.2 74.56,81.65 75.26,80.95 Q14.4
N$28
  pour Bottom (isolate 0.305): 66.29,92.46 87.88,92.46 87.88,61.98 66.29,61.98
N$29
  Top 0.254: R30.1 R29.2 96.66,81.65 97.36,80.95 Q15.4
N$30
  pour Bottom (isolate 0.305): 88.39,92.46 109.98,92.46 109.98,61.98 88.39,61.98
N$31
  Top 0.254: R32.1 R31.2 8.27,112.63 8.97,111.94 Q16.4
N$32
  pour Bottom (isolate 0.305): 0,123.44 21.59,123.44 21.59,92.96 0,92.96
N$33
  Top 0.254: R34.1 R33.2 30.37,112.63 31.06,111.94 Q17.4
N$34
  pour Bottom (isolate 0.305): 22.1,123.44 43.69,123.44 43.69,92.96 22.1,92.96
N$35
  Top 0.254: R36.1 R35.2 52.47,112.63 53.16,111.94 Q18.4
N$36
  pour Bottom (isolate 0.305): 44.2,123.44 65.79,123.44 65.79,92.96 44.2,92.96
N$37
  Top 0.254: R38.1 R37.2 74.56,112.63 75.26,111.94 Q19.4
N$38
  pour Bottom (isolate 0.305): 66.29,123.44 87.88,123.44 87.88,92.96 66.29,92.96
N$39
  Top 0.254: R40.1 R39.2 96.66,112.63 97.36,111.94 Q20.4
N$40
  pour Bottom (isolate 0.305): 88.39,123.44 109.98,123.44 109.98,92.96 88.39,92.96
OUT-
  Top 1.27: 3.81,11.43 3.81,7.62
  pour Top (isolate 0.305): 7.11,11.43 7.11,30.48 0,30.48 0,0 10.16,0 10.16,8.51
OUT-1
  Top 1.27: 25.91,11.43 25.91,7.62
  pour Top (isolate 0.305): 29.21,11.43 29.21,30.48 22.1,30.48 22.1,0 32.26,0 32.26,8.51
OUT-2
  Top 1.27: 48.01,11.43 48.01,7.62
  pour Top (isolate 0.305): 51.31,11.43 51.31,30.48 44.2,30.48 44.2,0 54.36,0 54.36,8.51
OUT-3
  Top 1.27: 70.1,11.43 70.1,7.62
  pour Top (isolate 0.305): 73.41,11.43 73.41,30.48 66.29,30.48 66.29,0 76.45,0 76.45,8.51
OUT-4
  Top 1.27: 92.2,11.43 92.2,7.62
  pour Top (isolate 0.305): 95.5,11.43 95.5,30.48 88.39,30.48 88.39,0 98.55,0 98.55,8.51
OUT-5
  Top 1.27: 3.81,42.42 3.81,38.61
  pour Top (isolate 0.305): 7.11,42.42 7.11,61.47 0,61.47 0,30.99 10.16,30.99 10.16,39.5
OUT-6
  Top 1.27: 25.91,42.42 25.91,38.61
  pour Top (isolate 0.305): 29.21,42.42 29.21,61.47 22.1,61.47 22.1,30.99 32.26,30.99 32.26,39.5
OUT-7
  Top 1.27: 48.01,42.42 48.01,38.61
  pour Top (isolate 0.305): 51.31,42.42 51.31,61.47 44.2,61.47 44.2,30.99 54.36,30.99 54.36,39.5
OUT-8
  Top 1.27: 70.1,42.42 70.1,38.61
  pour Top (isolate 0.305): 73.41,42.42 73.41,61.47 66.29,61.47 66.29,30.99 76.45,30.99 76.45,39.5
OUT-9
  Top 1.27: 92.2,42.42 92.2,38.61
  pour Top (isolate 0.305): 95.5,42.42 95.5,61.47 88.39,61.47 88.39,30.99 98.55,30.99 98.55,39.5
OUT-10
  Top 1.27: 3.81,73.41 3.81,69.6
  pour Top (isolate 0.305): 7.11,73.41 7.11,92.46 0,92.46 0,61.98 10.16,61.98 10.16,70.48
OUT-11
  Top 1.27: 25.91,73.41 25.91,69.6
  pour Top (isolate 0.305): 29.21,73.41 29.21,92.46 22.1,92.46 22.1,61.98 32.26,61.98 32.26,70.48
OUT-12
  Top 1.27: 48.01,73.41 48.01,69.6
  pour Top (isolate 0.305): 51.31,73.41 51.31,92.46 44.2,92.46 44.2,61.98 54.36,61.98 54.36,70.48
OUT-13
  Top 1.27: 70.1,73.41 70.1,69.6
  pour Top (isolate 0.305): 73.41,73.41 73.41,92.46 66.29,92.46 66.29,61.98 76.45,61.98 76.45,70.48
OUT-14
  Top 1.27: 92.2,73.41 92.2,69.6
  pour Top (isolate 0.305): 95.5,73.41 95.5,92.46 88.39,92.46 88.39,61.98 98.55,61.98 98.55,70.48
OUT-15
  Top 1.27: 3.81,104.39 3.81,100.58
  pour Top (isolate 0.305): 7.11,104.39 7.11,123.44 0,123.44 0,92.96 10.16,92.96 10.16,101.47
OUT-16
  Top 1.27: 25.91,104.39 25.91,100.58
  pour Top (isolate 0.305): 29.21,104.39 29.21,123.44 22.1,123.44 22.1,92.96 32.26,92.96 32.26,101.47
OUT-17
  Top 1.27: 48.01,104.39 48.01,100.58
  pour Top (isolate 0.305): 51.31,104.39 51.31,123.44 44.2,123.44 44.2,92.96 54.36,92.96 54.36,101.47
OUT-18
  Top 1.27: 70.1,104.39 70.1,100.58
  pour Top (isolate 0.305): 73.41,104.39 73.41,123.44 66.29,123.44 66.29,92.96 76.45,92.96 76.45,101.47
OUT-19
  Top 1.27: 92.2,104.39 92.2,100.58
  pour Top (isolate 0.305): 95.5,104.39 95.5,123.44 88.39,123.44 88.39,92.96 98.55,92.96 98.55,101.47
TRIG+
  Top 0.254: 8.89,25.4 JP3.1 | BH1.P$1 7.11,25.4 | 7.11,25.4 8.89,25.4 | R1.1 6.97,25.26 7.11,25.4 | 8.89,25.4 8.89,27.3 JP5.2
TRIG+1
  Top 0.254: 30.99,25.4 JP9.1 | BH5.P$1 29.21,25.4 | 29.21,25.4 30.99,25.4 | R3.1 29.07,25.26 29.21,25.4 | 30.99,25.4 30.99,27.3 JP12.2
TRIG+2
  Top 0.254: 53.09,25.4 JP16.1 | BH9.P$1 51.31,25.4 | 51.31,25.4 53.09,25.4 | R5.1 51.17,25.26 51.31,25.4 | 53.09,25.4 53.09,27.3 JP19.2
TRIG+3
  Top 0.254: 75.18,25.4 JP23.1 | BH13.P$1 73.41,25.4 | 73.41,25.4 75.18,25.4 | R7.1 73.26,25.26 73.41,25.4 | 75.18,25.4 75.18,27.3 JP26.2
TRIG+4
  Top 0.254: 97.28,25.4 JP30.1 | BH17.P$1 95.5,25.4 | 95.5,25.4 97.28,25.4 | R9.1 95.36,25.26 95.5,25.4 | 97.28,25.4 97.28,27.3 JP33.2
TRIG+5
  Top 0.254: 8.89,56.39 JP37.1 | BH21.P$1 7.11,56.39 | 7.11,56.39 8.89,56.39 | R11.1 6.97,56.25 7.11,56.39 | 8.89,56.39 8.89,58.29 JP40.2
TRIG+6
  Top 0.254: 30.99,56.39 JP44.1 | BH25.P$1 29.21,56.39 | 29.21,56.39 30.99,56.39 | R13.1 29.07,56.25 29.21,56.39 | 30.99,56.39 30.99,58.29 JP47.2
TRIG+7
  Top 0.254: 53.09,56.39 JP51.1 | BH29.P$1 51.31,56.39 | 51.31,56.39 53.09,56.39 | R15.1 51.17,56.25 51.31,56.39 | 53.09,56.39 53.09,58.29 JP54.2
TRIG+8
  Top 0.254: 75.18,56.39 JP58.1 | BH33.P$1 73.41,56.39 | 73.41,56.39 75.18,56.39 | R17.1 73.26,56.25 73.41,56.39 | 75.18,56.39 75.18,58.29 JP61.2
TRIG+9
  Top 0.254: 97.28,56.39 JP65.1 | BH37.P$1 95.5,56.39 | 95.5,56.39 97.28,56.39 | R19.1 95.36,56.25 95.5,56.39 | 97.28,56.39 97.28,58.29 JP68.2
TRIG+10
  Top 0.254: 8.89,87.38 JP72.1 | BH41.P$1 7.11,87.38 | 7.11,87.38 8.89,87.38 | R21.1 6.97,87.23 7.11,87.38 | 8.89,87.38 8.89,89.28 JP75.2
TRIG+11
  Top 0.254: 30.99,87.38 JP79.1 | BH45.P$1 29.21,87.38 | 29.21,87.38 30.99,87.38 | R23.1 29.07,87.23 29.21,87.38 | 30.99,87.38 30.99,89.28 JP82.2
TRIG+12
  Top 0.254: 53.09,87.38 JP86.1 | BH49.P$1 51.31,87.38 | 51.31,87.38 53.09,87.38 | R25.1 51.17,87.23 51.31,87.38 | 53.09,87.38 53.09,89.28 JP89.2
TRIG+13
  Top 0.254: 75.18,87.38 JP93.1 | BH53.P$1 73.41,87.38 | 73.41,87.38 75.18,87.38 | R27.1 73.26,87.23 73.41,87.38 | 75.18,87.38 75.18,89.28 JP96.2
TRIG+14
  Top 0.254: 97.28,87.38 JP100.1 | BH57.P$1 95.5,87.38 | 95.5,87.38 97.28,87.38 | R29.1 95.36,87.23 95.5,87.38 | 97.28,87.38 97.28,89.28 JP103.2
TRIG+15
  Top 0.254: 8.89,118.36 JP107.1 | BH61.P$1 7.11,118.36 | 7.11,118.36 8.89,118.36 | R31.1 6.97,118.22 7.11,118.36 | 8.89,118.36 8.89,120.27 JP110.2
TRIG+16
  Top 0.254: 30.99,118.36 JP114.1 | BH65.P$1 29.21,118.36 | 29.21,118.36 30.99,118.36 | R33.1 29.07,118.22 29.21,118.36 | 30.99,118.36 30.99,120.27 JP117.2
TRIG+17
  Top 0.254: 53.09,118.36 JP121.1 | BH69.P$1 51.31,118.36 | 51.31,118.36 53.09,118.36 | R35.1 51.17,118.22 51.31,118.36 | 53.09,118.36 53.09,120.27 JP124.2
TRIG+18
  Top 0.254: 75.18,118.36 JP128.1 | BH73.P$1 73.41,118.36 | 73.41,118.36 75.18,118.36 | R37.1 73.26,118.22 73.41,118.36 | 75.18,118.36 75.18,120.27 JP131.2
TRIG+19
  Top 0.254: 97.28,118.36 JP135.1 | BH77.P$1 95.5,118.36 | 95.5,118.36 97.28,118.36 | R39.1 95.36,118.22 95.5,118.36 | 97.28,118.36 97.28,120.27 JP138.2
V_BATT
  Top 1.27: 17.78,10.03 17.78,7.62
  pour Top (isolate 0.305): 8.26,14.48 8.26,11.68 11.18,8.89 11.18,0 21.59,0 21.59,14.48
V_BATT1
  Top 1.27: 39.88,10.03 39.88,7.62
  pour Top (isolate 0.305): 30.35,14.48 30.35,11.68 33.27,8.89 33.27,0 43.69,0 43.69,14.48
V_BATT2
  Top 1.27: 61.98,10.03 61.98,7.62
  pour Top (isolate 0.305): 52.45,14.48 52.45,11.68 55.37,8.89 55.37,0 65.79,0 65.79,14.48
V_BATT3
  Top 1.27: 84.07,10.03 84.07,7.62
  pour Top (isolate 0.305): 74.55,14.48 74.55,11.68 77.47,8.89 77.47,0 87.88,0 87.88,14.48
V_BATT4
  Top 1.27: 106.17,10.03 106.17,7.62
  pour Top (isolate 0.305): 96.65,14.48 96.65,11.68 99.57,8.89 99.57,0 109.98,0 109.98,14.48
V_BATT5
  Top 1.27: 17.78,41.02 17.78,38.61
  pour Top (isolate 0.305): 8.26,45.47 8.26,42.67 11.18,39.88 11.18,30.99 21.59,30.99 21.59,45.47
V_BATT6
  Top 1.27: 39.88,41.02 39.88,38.61
  pour Top (isolate 0.305): 30.35,45.47 30.35,42.67 33.27,39.88 33.27,30.99 43.69,30.99 43.69,45.47
V_BATT7
  Top 1.27: 61.98,41.02 61.98,38.61
  pour Top (isolate 0.305): 52.45,45.47 52.45,42.67 55.37,39.88 55.37,30.99 65.79,30.99 65.79,45.47
V_BATT8
  Top 1.27: 84.07,41.02 84.07,38.61
  pour Top (isolate 0.305): 74.55,45.47 74.55,42.67 77.47,39.88 77.47,30.99 87.88,30.99 87.88,45.47
V_BATT9
  Top 1.27: 106.17,41.02 106.17,38.61
  pour Top (isolate 0.305): 96.65,45.47 96.65,42.67 99.57,39.88 99.57,30.99 109.98,30.99 109.98,45.47
V_BATT10
  Top 1.27: 17.78,72.01 17.78,69.6
  pour Top (isolate 0.305): 8.26,76.45 8.26,73.66 11.18,70.87 11.18,61.98 21.59,61.98 21.59,76.45
V_BATT11
  Top 1.27: 39.88,72.01 39.88,69.6
  pour Top (isolate 0.305): 30.35,76.45 30.35,73.66 33.27,70.87 33.27,61.98 43.69,61.98 43.69,76.45
V_BATT12
  Top 1.27: 61.98,72.01 61.98,69.6
  pour Top (isolate 0.305): 52.45,76.45 52.45,73.66 55.37,70.87 55.37,61.98 65.79,61.98 65.79,76.45
V_BATT13
  Top 1.27: 84.07,72.01 84.07,69.6
  pour Top (isolate 0.305): 74.55,76.45 74.55,73.66 77.47,70.87 77.47,61.98 87.88,61.98 87.88,76.45
V_BATT14
  Top 1.27: 106.17,72.01 106.17,69.6
  pour Top (isolate 0.305): 96.65,76.45 96.65,73.66 99.57,70.87 99.57,61.98 109.98,61.98 109.98,76.45
V_BATT15
  Top 1.27: 17.78,103 17.78,100.58
  pour Top (isolate 0.305): 8.26,107.44 8.26,104.65 11.18,101.85 11.18,92.96 21.59,92.96 21.59,107.44
V_BATT16
  Top 1.27: 39.88,103 39.88,100.58
  pour Top (isolate 0.305): 30.35,107.44 30.35,104.65 33.27,101.85 33.27,92.96 43.69,92.96 43.69,107.44
V_BATT17
  Top 1.27: 61.98,103 61.98,100.58
  pour Top (isolate 0.305): 52.45,107.44 52.45,104.65 55.37,101.85 55.37,92.96 65.79,92.96 65.79,107.44
V_BATT18
  Top 1.27: 84.07,103 84.07,100.58
  pour Top (isolate 0.305): 74.55,107.44 74.55,104.65 77.47,101.85 77.47,92.96 87.88,92.96 87.88,107.44
V_BATT19
  Top 1.27: 106.17,103 106.17,100.58
  pour Top (isolate 0.305): 96.65,107.44 96.65,104.65 99.57,101.85 99.57,92.96 109.98,92.96 109.98,107.44

## Text on the board
Top: v10 | v10 | v10 | v10 | v10 | v10 | v10 | v10 | v10 | v10 | v10 | v10 | v10 | v10 | v10 | v10 | v10 | v10 | v10 | v10
tPlace: IN+ | IN- | IN+ | IN- | IN+ | IN- | IN+ | IN- | IN+ | IN- | - | - | - | - | - | + | + | + | + | + | - | + | - | + | - | + | - | + | - | + | IN+ | IN- | IN+ | IN- | IN+ | IN- | IN+ | IN- | IN+ | IN- | - | - | - | - | - | + | + | + | + | + | - | + | - | + | - | + | - | + | - | + | IN+ | IN- | IN+ | IN- | IN+ | IN- | IN+ | IN- | IN+ | IN- | - | - | - | - | - | + | + | + | + | + | - | + | - | + | - | + | - | + | - | + | IN+ | IN- | IN+ | IN- | IN+ | IN- | IN+ | IN- | IN+ | IN- | - | - | - | - | - | + | + | + | + | + | - | + | - | + | - | + | - | + | - | +